# Altium PCB manip-cam-module.PcbDoc
Units mm, origin at the board's own origin, x right, y up, seen from the top; angles counter-clockwise.
Board outline 152.4 x 101.6 mm, 2 copper layers (Top Layer, Bottom Layer); 7 components, 14 nets, 60 pads, 7 vias.
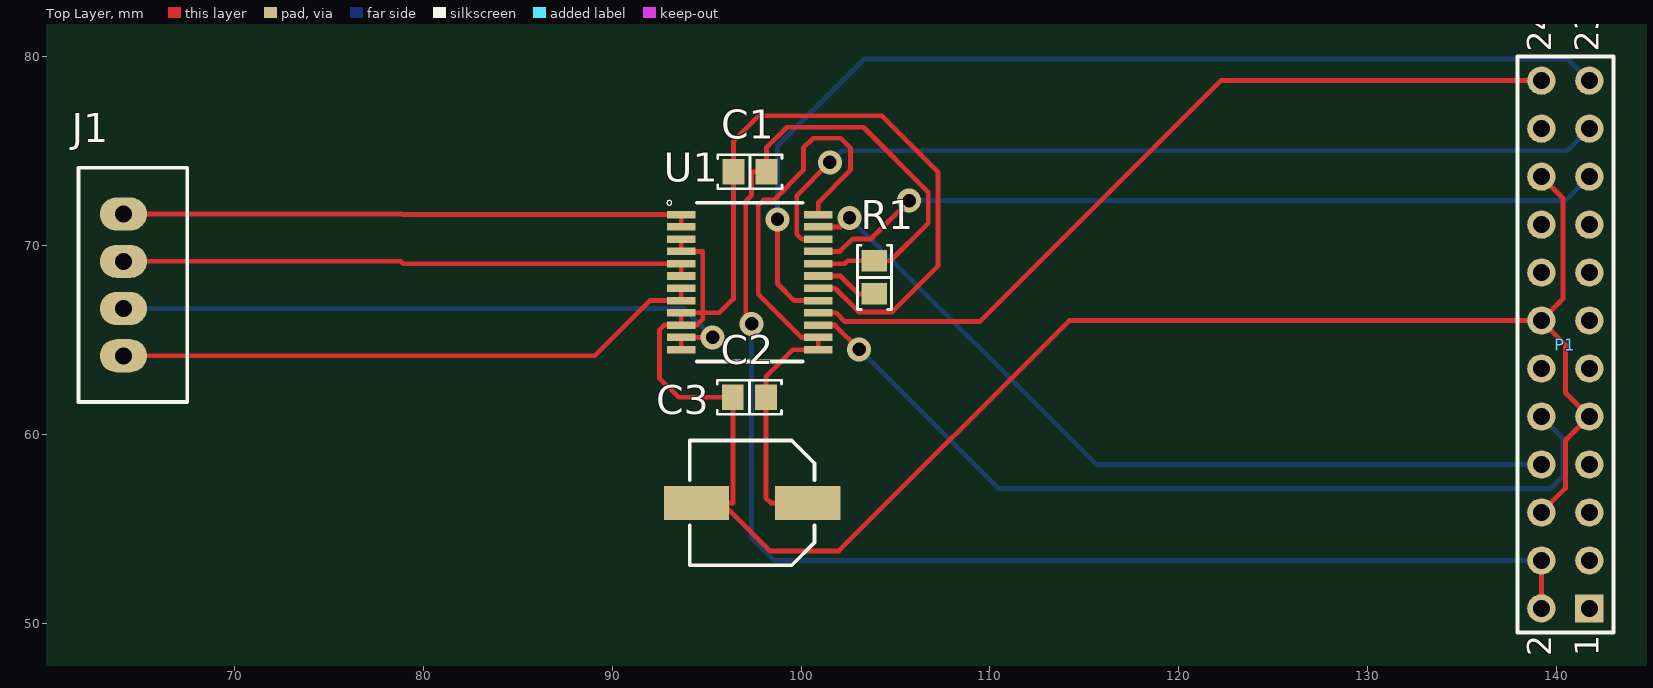
[diagram p0: Top Layer view]
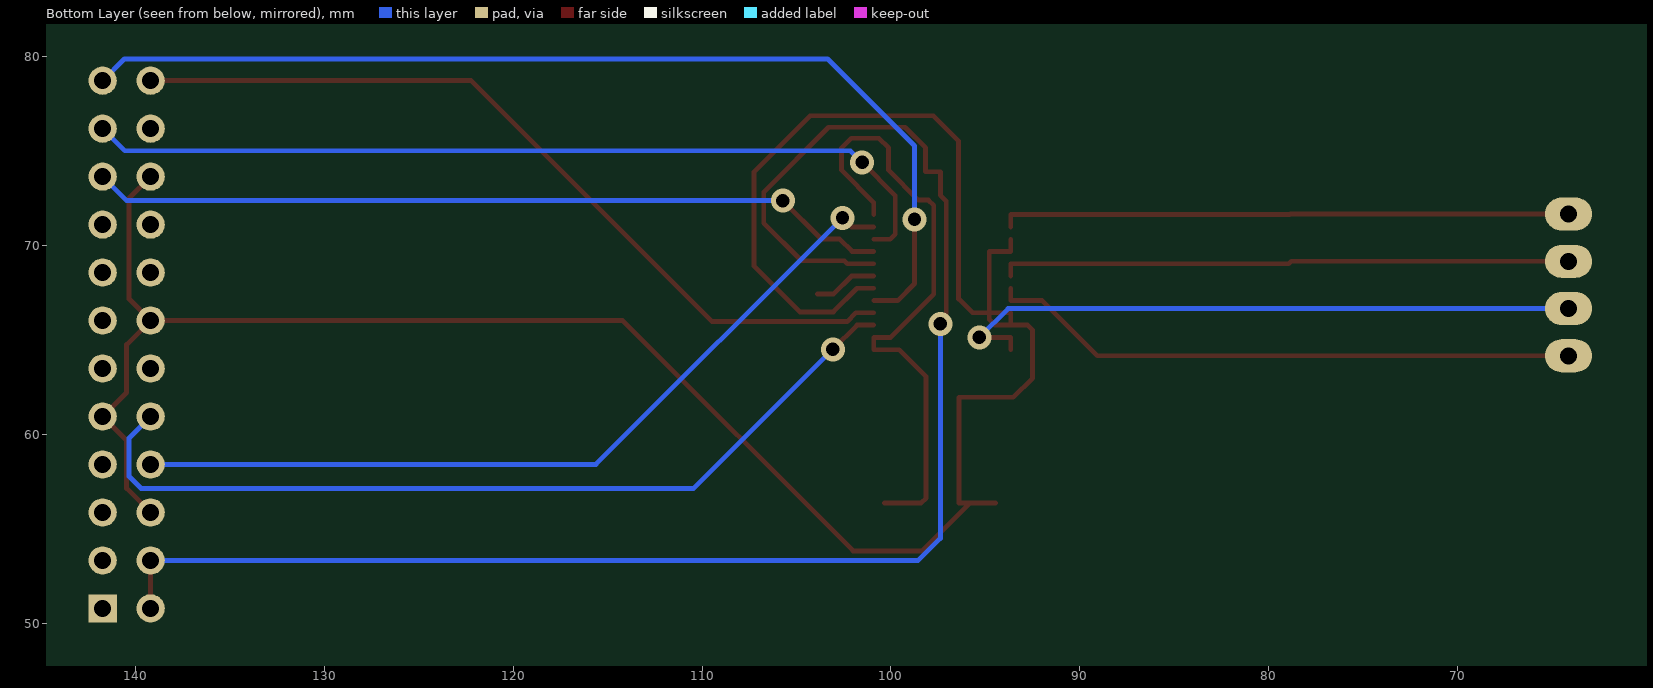
[diagram p1: Bottom Layer view, seen from below]
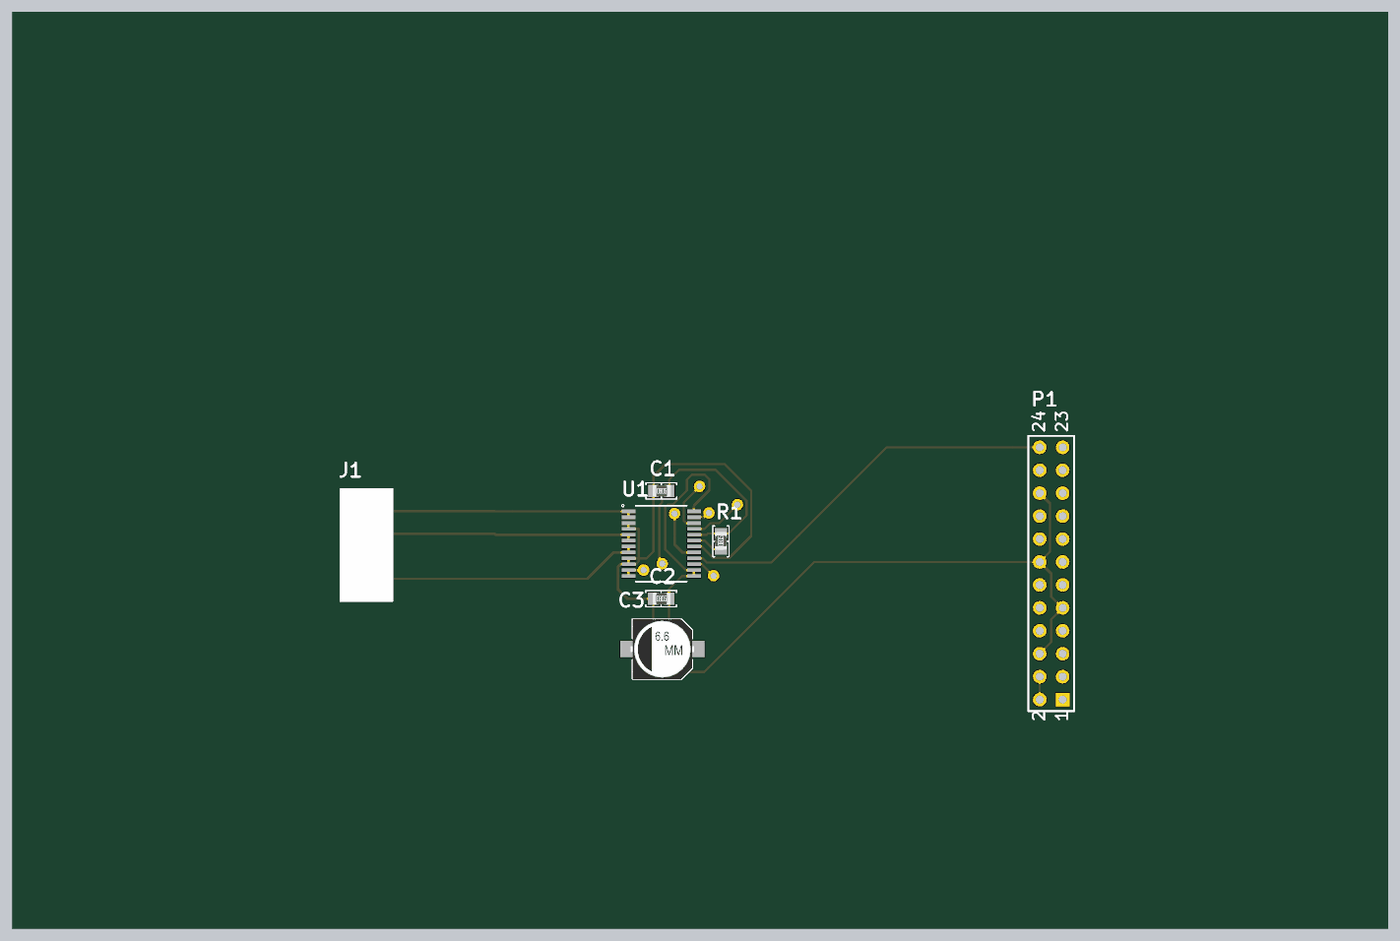
[diagram p2: 3D render of the assembled board from above, using the file's embedded part models]

## Layer stack, top to bottom
Top Solder: solder mask 0.0102, Solder Resist, Dk 3.5
Top Layer: signal copper 0.0356
Dielectric 1: dielectric 0.32, FR-4, Dk 4.8
Bottom Layer: signal copper 0.0356
Bottom Solder: solder mask 0.0102, Solder Resist, Dk 3.5

## Board outline
25.4,25.4 177.8,25.4 177.8,127 25.4,127

## Design rules (kind name [scope] priority, off if disabled: settings)
Clearance [All] p1: gap=0.254 ignorepadtopadclearanceinfootprint=FALSE except(0: Arc-Hole Track-Hole SMDPad-Hole THPad-Hole Via-Hole Fill-Hole Poly-Hole Region-Hole Text-Hole)
PolygonConnect [All] p1: connectstyle=Relief reliefconductorwidth=0.254 reliefentries=4 polygonreliefangle="90 Angle" airgapwidth=0.254
RoutingVias [All] p1: holewidth=0.711 width=1.27 viastyle="Through Hole" minholewidth=0.711 minwidth=1.27 maxholewidth=0.711 maxwidth=1.27
SolderMaskExpansion [All] p1: expansion=0.102
Width [All] p1: maxlimit=0.254 minlimit=0.254 preferedwidth=0.254
30 further rules are at their usual default settings.

## Components (designator, comment, footprint, x,y, rotation, side; value= is the part's Value field where it differs from the comment)
C1 "0.1uF" "RES 0805/2012" 97.296,73.914 r0 top
C2 "0.1uF" "RES 0805/2012" 97.268,61.976 r0 top
C3 "22uF" "CAP ALUM 6.6MM" 97.409,56.388 r180 top
J1 "B4B-XH-A(LF)(SN)" "JST XH B4B-XH-A" 64.135,67.925 r90 top
P1 "Header 12X2" HDR2X12 141.732,50.8 r90 top
R1 "10k" "RES 0805/2012" 103.886,68.326 r90 top
U1 "TB6612FNG(O,C,8,EL)" SOP65P760X160-24N 97.282,68.072 r0 top

## Footprints (in the part's own frame and the unit in brackets; to place one, negate y for a bottom-side part, rotate by r counter-clockwise, add the part's x,y. Pads: shape width x height; smd on the part's side, far side on the other; paste and mask are expansions set on the pad)
"CAP ALUM 6.6MM" [mm] "Aluminum Electrolytic Capacitor, Body 6.60x6.60x7.70mm, IPC Low Density"
  rect 3.45x1.8 smd: 1(-2.95,0) 2(2.95,0)
  silkscreen extent -3.3,-3.3 3.3,3.3, body extent -3.5,-3.3 3.5,3.3, height 7.7
HDR2X12 [mm] "Connector; Header; 12x2 Position"
  rect 1.5x1.5 hole 0.9: 1(0,0)
  round 1.5 hole 0.9: 2(0,2.54) 3(2.54,0) 4(2.54,2.54) 5(5.08,0) 6(5.08,2.54) 7(7.62,0) 8(7.62,2.54) 9(10.16,0) 10(10.16,2.54) 11(12.7,0) 12(12.7,2.54) 13(15.24,0) 14(15.24,2.54) 15(17.78,0) 16(17.78,2.54) 17(20.32,0) 18(20.32,2.54) 19(22.86,0) 20(22.86,2.54) 21(25.4,0) 22(25.4,2.54) 23(27.94,0) 24(27.94,2.54)
  silkscreen extent -1.27,-1.27 29.21,3.81
"JST XH B4B-XH-A" [mm]
  oval 1.75x2.5 hole 0.9: 1(-3.75,0) 2(-1.25,0) 3(1.25,0) 4(3.75,0)
  silkscreen extent -6.2,-3.38 6.2,2.38, body extent -6.2,-3.38 6.2,2.38, height 7
"RES 0805/2012" [mm] "Chip Resistor, 2-Leads, Body 2.00x1.25mm, IPC Medium Density"
  rect 1.15x1.35 smd: 1(-0.875,0) 2(0.875,0)
  silkscreen extent -1.7,-0.9 1.7,0.9, body extent -0.95,-0.62 1.05,0.63, height 0.6
SOP65P760X160-24N [mm]
  rect 1.5x0.4 smd: 1(-3.625,3.575) 2(-3.625,2.925) 3(-3.625,2.275) 4(-3.625,1.625) 5(-3.625,0.975) 6(-3.625,0.325) 7(-3.625,-0.325) 8(-3.625,-0.975) 9(-3.625,-1.625) 10(-3.625,-2.275) 11(-3.625,-2.925) 12(-3.625,-3.575) 13(3.625,-3.575) 14(3.625,-2.925) 15(3.625,-2.275) 16(3.625,-1.625) 17(3.625,-0.975) 18(3.625,-0.325) 19(3.625,0.325) 20(3.625,0.975) 21(3.625,1.625) 22(3.625,2.275) 23(3.625,2.925) 24(3.625,3.575)
  silkscreen extent -4.38,-4.2 2.8,4.33

## Part data
C1 C2: library part C2012X7R1H104K085AA, "CAP CER 0.1UF 50V X7R 0805", Device Package="0805 (2012 Metric)", Manufacturer="TDK Corporation", Supplier Part Number 1=445-7534-2-ND, TemperatureCoefficient=X7R, TemperatureRange="-55C ~ 125C", Tolerance=10%, Voltage=50V, ComponentLink1Description=Datasheet, ComponentLink1URL=https://product.tdk.com/info/en/catalog/datasheets/mlcc_commercial_general_en.pdf, ComponentLink2Description="Digi-Key listing", ComponentLink2URL=http://digikey.com/product-detail/en/C2012X7R1H104K085AA/445-7534-2-ND/2732969, PartId=4390, Part Number=C2012X7R1H104K085AA, Price=0,0182, Supplier 1=Digi-Key, Type=-
C3: library part EEE-1EA220AP, "CAP ALUM 22UF 20% 25V SMD", Device Package="Radial, Can - SMD", Lifetime @ Temp="2000 Hrs @ 85C", Manufacturer="Panasonic Electronic Components", Ripple Current=55mA, Supplier Part Number 1=PCE4596TR-ND, TemperatureRange="-40C ~ 85C", Tolerance=20%, Voltage=25V, ComponentLink1Description=Datasheet, ComponentLink1URL=http://media.digikey.com/pdf/Data%20Sheets/Panasonic%20Electronic%20Components/S_Series_Type_V.pdf, ComponentLink2Description="Digi-Key listing", ComponentLink2URL=http://digikey.com/product-detail/en/EEE-1EA220AP/PCE4596TR-ND/1717762, Impedance=-, PartId=7220, Part Number=EEE-1EA220AP, Price=0,1368, Supplier 1=Digi-Key, Type="High Temperature Reflow"
J1: "CONN HEADER XH TOP 4POS 2.5MM", Colour=Natural, Manufacturer="JST Sales America Inc.", Supplier Part Number 1=455-2249-ND, ComponentLink1Description=Datasheet, ComponentLink1URL=http://www.jst-mfg.com/product/pdf/eng/eXH.pdf, ComponentLink2Description="Digi-Key Listing", ComponentLink2URL=http://www.digikey.com/product-detail/en/jst-sales-america-inc/B4B-XH-A(LF)(SN)/455-2249-ND/1651047, Contact Finish=Tin, Fastening Type="Detent Lock", Number Of Positions=4, Number Of Rows=1, PartId=16451, Part Number=B4B-XH-A(LF)(SN), Pitch="0.098\" (2.50mm)", Price=0,21, Series=XH, Supplier 1=Digi-Key, Type="Header, Shrouded"
P1: "Header, 12-Pin, Dual row", LatestRevisionDate=17-Jul-2002, LatestRevisionNote="Re-released for DXP Platform.", Publisher="Altium Limited"
R1: library part ERA-6AEB103V, "RES SMD 10K OHM 0.1% 1/8W 0805", Device Package="0805 (2012 Metric)", Manufacturer="Panasonic Electronic Components", PowerRating="0.125W, 1/8W", Supplier Part Number 1=P10KDATR-ND, TemperatureCoefficient=25ppm/C, TemperatureRange="-55C ~ 155C", Tolerance=0.1%, ComponentLink1Description=Datasheet, ComponentLink1URL=http://industrial.panasonic.com/lecs/www-data/pdf/AOA0000/AOA0000CE26.pdf, ComponentLink2Description="Digi-Key listing", ComponentLink2URL=http://digikey.com/product-detail/en/ERA-6AEB103V/P10KDATR-ND/1465773, PartId=2446, Part Number=ERA-6AEB103V, Price=0,0653, Supplier 1=Digi-Key, Type="Thin Film"
U1: library part TB6612FNG(O,C,8,EL, "Stepping Motor Driver Ic Unipolor Copper Wire 8", Package="SSOP-24 Toshiba", Availability=Good, ComponentLink2URL=https://www.digikey.com/product-detail/en/toshiba-semiconductor-and-storage/TB6612FNGC8EL/TB6612FNGC8ELCT-ND/1730134, MF=Toshiba, MP=TB6612FNG(O,C,8,EL, Price="2.11 USD"

## Via types
v1: diameter 1.27, hole 0.711, Top Layer to Bottom Layer, 7 vias

## Nets (pads, with @x,y where several pads share a name; then routed paths per layer and width w, separated by ;. In a path a pad name is that pad's centre, name@x,y a point inside that pad or via, vN(x,y) a via of type N, cw(c..) or ccw(c..) an arc to the next point about the centre after c; other vN are vias at no path point)
GND: C1.1 C2.1 C3.2 P1.6 P1.9 P1.14 P1.20 U1.3 U1.4 U1.9 U1.10 U1.18 | length 130.1
  Top Layer w0.254: U1.3 U1.4 94.793,69.697 94.793,66.447 ; C3.2 C3.2@95.809,56.388 ; U1.18 101.798,67.747 103.05,66.495 104.824,66.495 107.244,68.915 107.244,73.914 104.282,76.876 97.755,76.876 96.421,75.542 C1.1 96.421,67.186 95.682,66.447 94.793,66.447 ; P1.6 140.462,57.15 140.462,59.69 P1.9 140.462,62.23 140.462,64.77 P1.14 ; P1.20 140.335,72.517 140.335,67.183 P1.14 ; U1.10 94.488,65.797 94.793,66.102 94.793,66.447 ; U1.10 92.772,65.797 92.507,65.532 92.507,62.992 93.523,61.976 C2.1 96.393,56.388 C3.2@95.809,56.388 ; U1.10 U1.9 94.793,66.447 ; C3.2@95.809,56.388 98.349,53.848 102.006,53.848 114.198,66.04 P1.14
NetJ1_1: J1.1 U1.7 U1.8 | length 31.4
  Top Layer w0.254: J1.1 89.077,64.175 91.999,67.097 U1.8 U1.7
NetJ1_2: J1.2 U1.11 U1.12 | length 34.1
  Top Layer w0.254: U1.12 U1.11 v1(95.326,65.147)
  Bottom Layer w0.254: J1.2 93.798,66.675 v1(95.326,65.147)
NetJ1_3: J1.3 U1.5 U1.6 | length 30.2
  Top Layer w0.254: J1.3 78.816,69.175 78.944,69.047 U1.5 U1.6
NetJ1_4: J1.4 U1.1 U1.2 | length 30.2
  Top Layer w0.254: J1.4 78.867,71.675 78.895,71.647 U1.1 U1.2
NetP1_8: P1.8 U1.23 | length 43.9
  Top Layer w0.254: U1.23 102.087,70.997 v1(102.565,71.476)
  Bottom Layer w0.254: v1(102.565,71.476) 115.621,58.42 P1.8
NetP1_10: P1.10 U1.15 | length 46.9
  Top Layer w0.254: U1.15 101.792,65.797 v1(103.073,64.516)
  Bottom Layer w0.254: v1(103.073,64.516) 110.439,57.15 139.7,57.15 140.335,57.785 140.335,59.817 P1.10
NetR1_1: R1.1 U1.19 | length 3.4
  Top Layer w0.254: U1.19 102.083,68.397 103.029,67.451 R1.1
toAIN1: P1.19 U1.21 | length 42.5
  Top Layer w0.254: U1.21 102.057,69.697 102.708,70.348 103.678,70.348 v1(105.72,72.39)
  Bottom Layer w0.254: v1(105.72,72.39) 140.462,72.39 P1.19
toAIN2: P1.21 U1.22 | length 46.7
  Top Layer w0.254: U1.22 100.036,70.347 99.771,70.612 99.771,72.657 v1(101.524,74.41)
  Bottom Layer w0.254: v1(101.524,74.41) 102.146,75.032 140.564,75.032 P1.21
toBIN1: P1.23 U1.17 | length 55.2
  Top Layer w0.254: v1(98.755,71.399) 98.755,67.986 99.644,67.097 U1.17
  Bottom Layer w0.254: v1(98.755,71.399) 98.755,75.286 103.353,79.883 140.589,79.883 P1.23
toBIN2: P1.24 U1.16 | length 43.8
  Top Layer w0.254: U1.16 101.862,66.447 102.322,65.987 109.472,65.987 122.225,78.74 P1.24
VCC: C1.2 P1.2 P1.4 R1.2 U1.20 | length 85.3
  Top Layer w0.254: v1(97.384,65.862) 97.079,66.167 97.079,72.365 97.384,72.669 97.384,73.914 C1.2 98.171,75.184 99.257,76.27 103.308,76.27 106.736,72.842 106.736,71.201 104.736,69.201 R1.2 102.465,69.201 102.311,69.047 U1.20 ; P1.2 P1.4
  Bottom Layer w0.254: v1(97.384,65.862) 97.384,54.508 98.552,53.34 P1.4
VM: C2.2 C3.1 U1.13 U1.14 U1.24 | length 33.1
  Top Layer w0.254: C3.1 98.397,56.388 98.143,56.642 C2.2 98.143,63.072 99.568,64.497 U1.13 U1.14 100.02,65.147 97.739,67.428 97.739,72.136 98.021,72.417 98.552,72.417 100.128,73.993 100.128,75.184 100.636,75.693 102.097,75.693 102.616,75.174 102.616,73.99 100.907,72.281 U1.24
pads on no net: P1.1 P1.3 P1.5 P1.7 P1.11 P1.12 P1.13 P1.15 P1.16 P1.17 P1.18 P1.22

## Text inside footprints (layer, text, board x,y; h text height)
P1: Top Overlay "1" at 142.24,48.26 h1.27 r90; Top Overlay "2" at 139.7,48.26 h1.27 r90; Top Overlay "23" at 142.24,80.264 h1.27 r90; Top Overlay "24" at 139.7,80.264 h1.27 r90